# EAGLE board k (EAGLE 7.1.0)
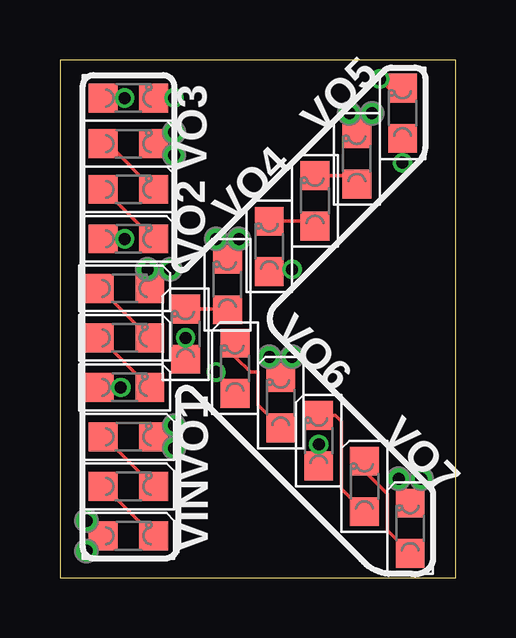
[diagram p0: board, top side]
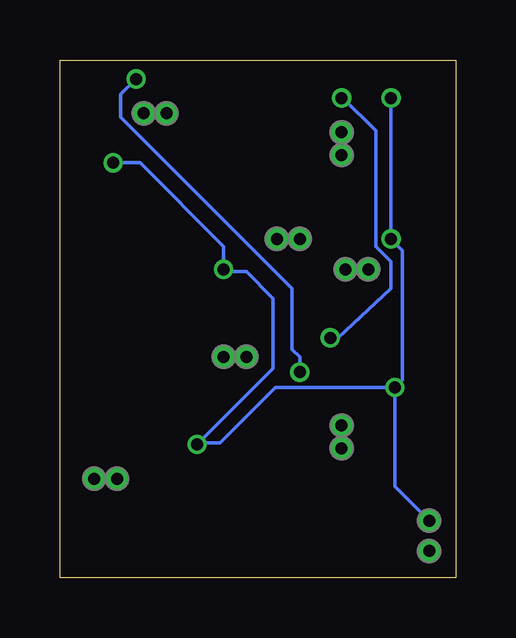
[diagram p1: board, bottom side, seen from below]

Size 16.51 x 21.59 mm. Coordinates in mm from the lower left corner, seen from the top.
Outline: 0,0 16.51,0 16.51,21.59 0,21.59 0,0
Copper layers (1*16): Top 0.035mm / dielectric 1.5mm / Bottom 0.035mm
Design rules "Fusion_eagle_rule_v1.1_tms *": minimum track width 6mil, minimum drill 12mil, track to track 6mil, track to pad 6mil, pad to pad 6mil, via to via 6mil, smd to smd 0mil, copper to edge 10mil, drill to drill 10mil, minimum pad ring 10mil, minimum via ring 6mil, stop-mask expansion 2mil, vias tented up to drill 100mil, thermal gap 10mil

## Footprints (pad centres in the part's own frame; a part is rotated, then mirrored left to right if it is on the bottom)
LED_0805 = smd 1.2 x 1.2: A 0,-1.05; C 0,1.05
P1-20 = drill 0.5: TP 0,0

## Placement (x,y rotation side)
LED1  [LED_0805]  2.86,1.75 270 top
LED2  [LED_0805]  2.86,3.81 270 top
LED3  [LED_0805]  2.86,5.87 270 top
LED4  [LED_0805]  2.7,7.94 270 top
LED5  [LED_0805]  2.7,10 270 top
LED6  [LED_0805]  2.7,12.06 270 top
LED7  [LED_0805]  2.86,14.13 270 top
LED8  [LED_0805]  2.86,16.19 270 top
LED9  [LED_0805]  2.86,18.1 270 top
LED10  [LED_0805]  2.86,20 270 top
LED11  [LED_0805]  5.24,10.16 0 top
LED12  [LED_0805]  6.99,12.22 0 top
LED13  [LED_0805]  8.73,13.81 0 top
LED14  [LED_0805]  10.64,15.72 0 top
LED15  [LED_0805]  12.38,17.46 0 top
LED16  [LED_0805]  14.29,19.37 0 top
LED17  [LED_0805]  7.3,8.73 0 top
LED18  [LED_0805]  9.21,7.3 0 top
LED19  [LED_0805]  10.79,5.71 0 top
LED20  [LED_0805]  12.7,3.81 0 top
LED21  [LED_0805]  14.61,2.06 0 top
VIN  [P1-20]  1.11,2.38 0 top
VIN1  [P1-20]  1.11,1.11 0 top
VO1  [P1-20]  4.76,6.35 0 top
VO2  [P1-20]  3.65,12.86 0 top
VO3  [P1-20]  4.76,18.57 0 top
VO4  [P1-20]  7.46,14.13 0 top
VO5  [P1-20]  12.06,19.37 0 top
VO6  [P1-20]  9.68,9.21 0 top
VO7  [P1-20]  15.08,4.13 0 top
VO8  [P1-20]  4.76,5.4 0 top
VO9  [P1-20]  4.6,12.86 0 top
VO10  [P1-20]  4.76,17.62 0 top
VO11  [P1-20]  6.51,14.13 0 top
VO12  [P1-20]  13.02,19.37 0 top
VO13  [P1-20]  8.73,9.21 0 top
VO14  [P1-20]  14.13,4.13 0 top

## Library data of the parts
LED1-LED21 VIN VIN1 VO1-VO14 = CyberRailGuru

## Nets
N$3: LED2.C LED3.A
N$4: LED1.C LED2.A
N$7: LED5.C LED6.A
N$8: LED4.C LED5.A
N$11: LED8.C LED9.A
N$12: LED7.C LED8.A
N$15: LED11.C LED12.A
N$16: LED10.C LED11.A
N$19: LED14.C LED15.A
N$20: LED13.C LED14.A
N$23: LED17.C LED18.A
N$24: LED16.C LED17.A
N$27: LED20.C LED21.A
N$28: LED19.C LED20.A
VIN: LED1.A LED4.A LED7.A LED10.A LED13.A LED16.A LED19.A VIN1.TP VIN.TP
VOUT1: LED3.C VO1.TP VO8.TP
VOUT2: LED6.C VO2.TP VO9.TP
VOUT3: LED9.C VO3.TP VO10.TP
VOUT4: LED12.C VO4.TP VO11.TP
VOUT5: LED15.C VO5.TP VO12.TP
VOUT6: LED18.C VO6.TP VO13.TP
VOUT7: LED21.C VO7.TP VO14.TP

## Tracks (layer width: path | path; a pad name or v marks a point on that pad's centre or on a via)
N$3
  Top 0.152: LED3.A 1.84,5.87 LED2.C
N$4
  Top 0.152: LED2.A 1.84,3.81 LED1.C
N$7
  Top 0.152: LED6.A 1.69,12.06 LED5.C
N$8
  Top 0.152: LED5.A 1.69,10 LED4.C
N$11
  Top 0.152: LED9.A 2,18.1 LED8.C
N$12
  Top 0.152: LED8.A 1.84,16.19 LED7.C
N$15
  Top 0.152: LED11.C 6.95,11.21 LED12.A
N$16  (via drill 0.5)
  Top 0.152: LED11.A v5.24,10 | v4.76,20 LED10.C
  Bottom 0.152: v5.24,10 4.92,10 2.7,12.06 2.7,13.18 3.33,13.81 3.33,18.64 4.7,20 v4.76,20
N$19
  Top 0.152: LED14.C 12.03,16.77 LED15.A
N$20
  Top 0.152: LED13.C 10.44,14.86 LED14.A
N$23
  Top 0.152: LED17.C 7.3,9.21 7.94,8.57 8.26,8.57 8.26,7.21 LED18.A
N$24  (via drill 0.5)
  Top 0.152: LED16.C 13.71,20.42 v13.34,20.8 | LED17.A 7.3,7.78 v6.51,8.57
  Bottom 0.152: v13.34,20.8 13.97,20.16 13.97,19.21 6.83,12.06 6.83,9.53 6.51,9.21 v6.51,8.57
N$27
  Top 0.152: LED20.C 12.7,4.45 13.65,3.49 13.65,1.97 LED21.A
N$28
  Top 0.152: LED20.A 11.75,3.71 11.75,6.51 11.49,6.76 LED19.C
VIN  (via drill 0.5)
  Top 0.152: VIN.TP 1.17,2.38 LED1.A 1.17,1.11 VIN1.TP | LED4.A v2.54,7.94 | LED7.A v2.7,14.13 | LED10.A v2.7,20 | LED16.A v14.29,17.3 | LED19.A v10.79,5.56 | v9.68,12.86 8.83,12.86 LED13.A
  Bottom 0.152: v2.54,7.94 2.54,3.81 VIN.TP | v2.7,20 v2.7,14.13 2.22,13.65 2.22,8.26 v2.54,7.94 | v14.29,17.3 13.18,17.3 9.68,13.81 v9.68,12.86 9.59,12.76 LED13.A 7.62,11.65 7.62,8.73 v10.79,5.56 10.73,5.62 9.84,5.62 7.52,7.94 v2.54,7.94
VOUT1
  Top 0.152: VO8.TP 4.38,5.4 LED3.C 4.38,6.35 VO1.TP
VOUT2
  Top 0.152: VO2.TP 3.65,12.16 LED6.C 4.54,12.86 VO9.TP
VOUT3
  Top 0.152: VO10.TP 4.38,17.62 LED9.C 4.38,18.57 VO3.TP
VOUT4
  Top 0.152: VO11.TP 6.51,13.75 LED12.C 7.46,13.75 VO4.TP
VOUT5
  Top 0.152: VO5.TP 12.06,18.83 LED15.C 13.02,19.15 VO12.TP
VOUT6
  Top 0.152: VO13.TP 8.73,8.83 LED18.C 9.68,8.83 VO6.TP
VOUT7
  Top 0.152: VO14.TP 14.13,3.59 LED21.C 15.08,3.59 VO7.TP

## Text on the board
201bmp: K